# EAGLE board esp32-mqtt-door-opener (EAGLE 9.5.1)
CREVISION: 3.1
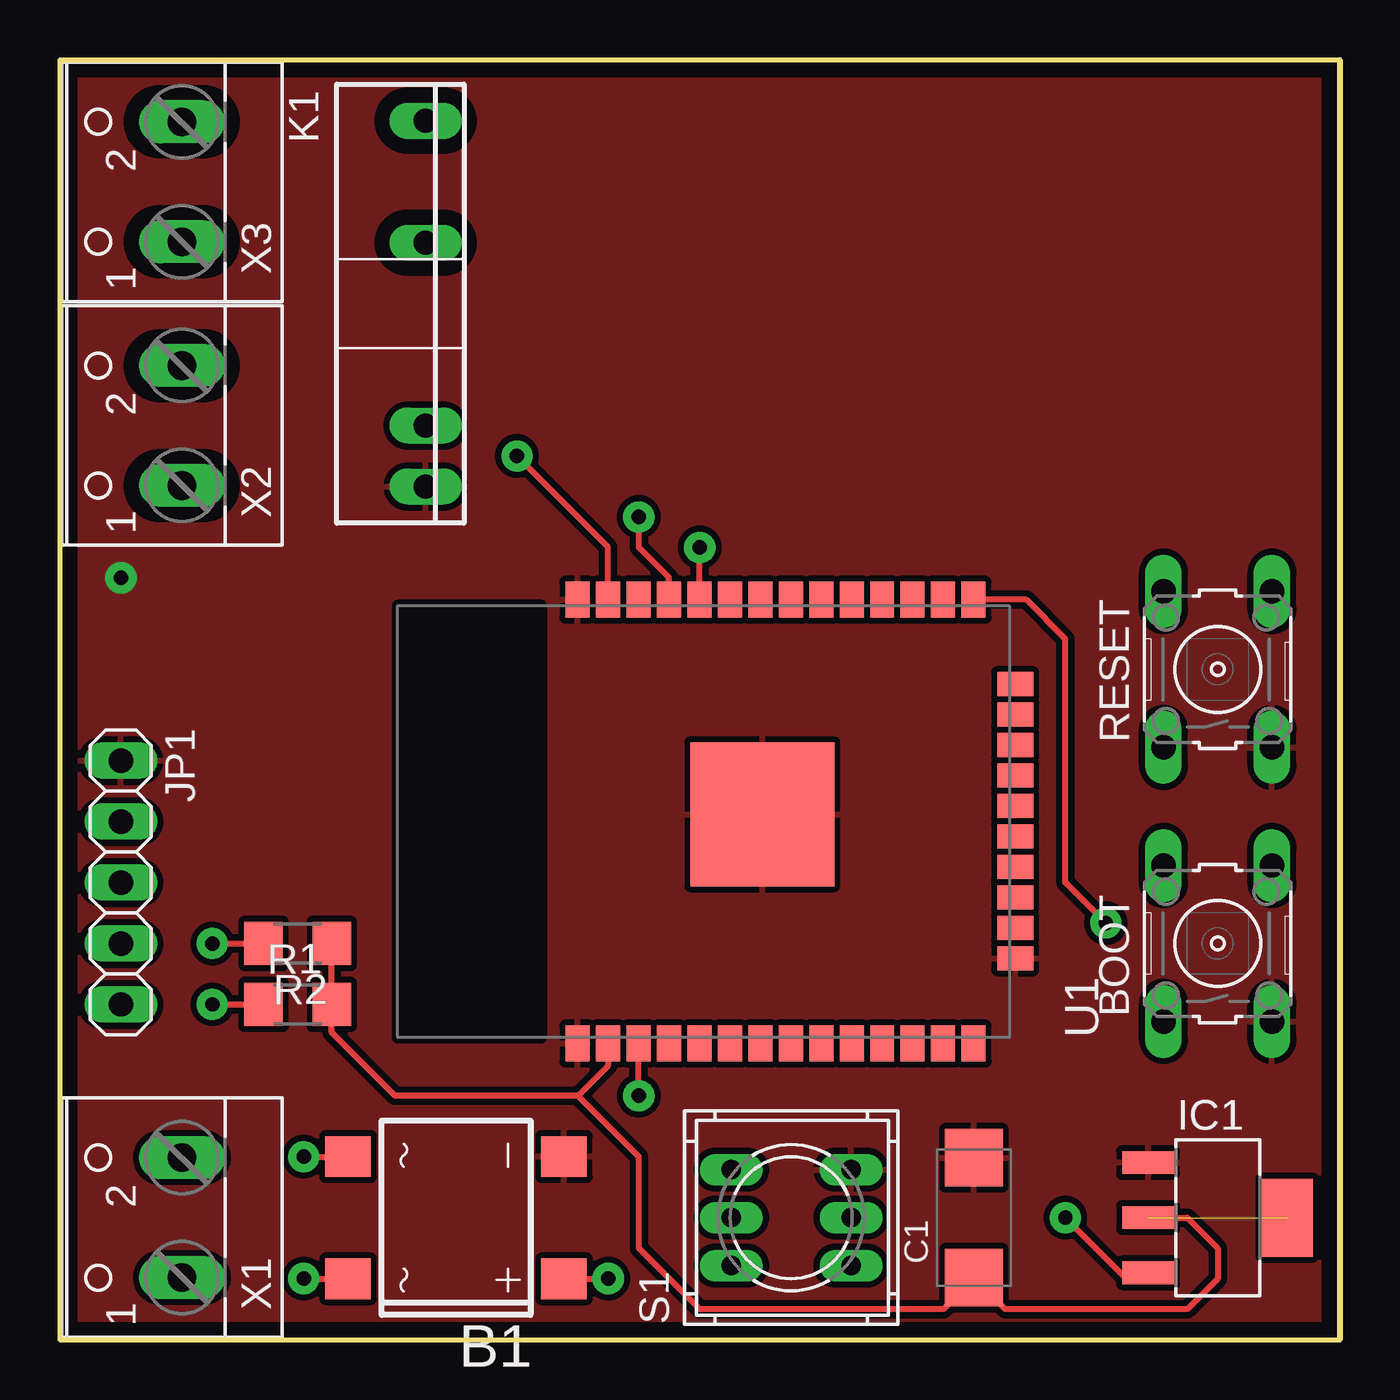
[diagram p0: board, top side]
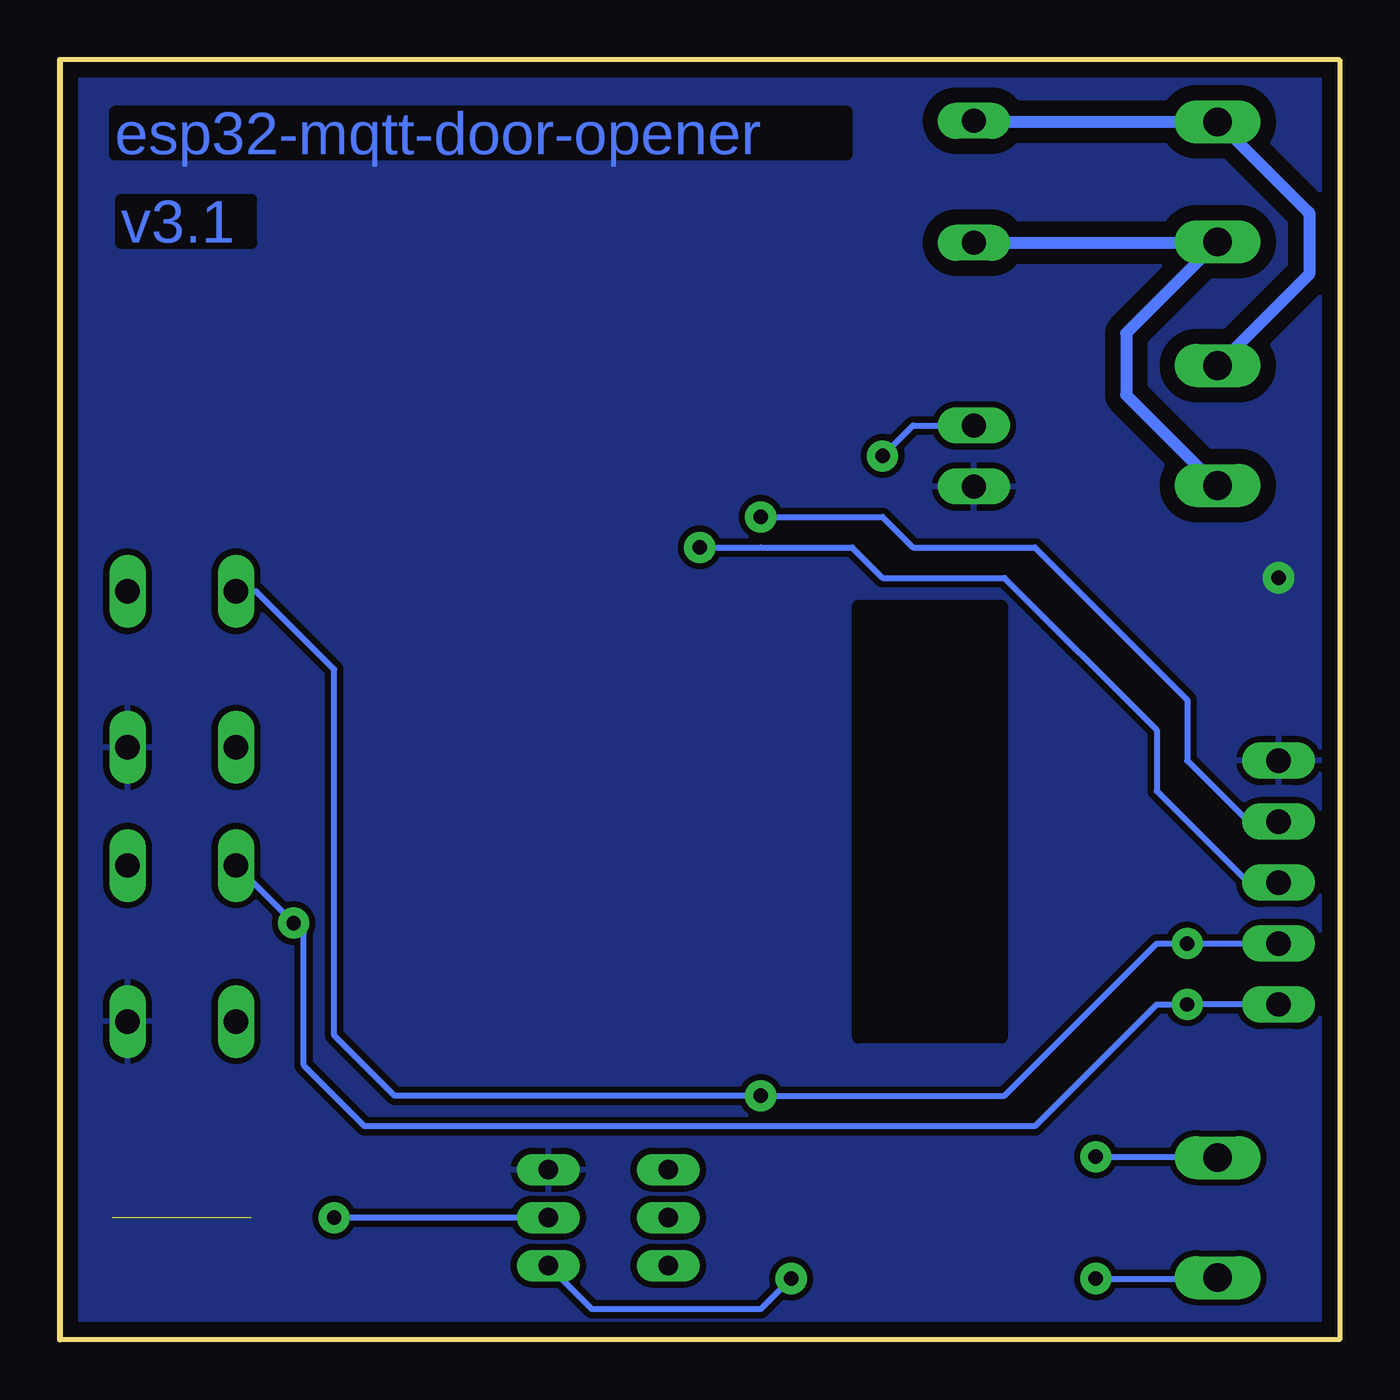
[diagram p1: board, bottom side, seen from below]

Size 53.34 x 53.34 mm. Coordinates in mm from the lower left corner, seen from the top.
Outline: 0,53.34 0,0 53.34,0 53.34,53.34 0,53.34
Copper layers (1*16): Top 0.035mm / dielectric 1.5mm / Bottom 0.035mm
Design rules "default *": minimum track width 6mil, minimum drill 0.35mm, track to track 6mil, track to pad 6mil, pad to pad 6mil, via to via 6mil, smd to smd 6mil, copper to edge 25mil, drill to drill 6mil, minimum pad ring 10mil, minimum via ring 8mil, stop-mask expansion 4mil, vias tented up to drill 0mil, thermal gap 10mil

## Footprints (pad centres in the part's own frame; a part is rotated, then mirrored left to right if it is on the bottom)
DBS = smd 1.7 x 1.9: + -2.55,-4.5; - 2.55,-4.5; AC1 -2.55,4.5; AC2 2.55,4.5
B3F-10XX = drill 1.016 long: 1 -3.251,2.261; 2 3.251,2.261; 3 -3.251,-2.261; 4 3.251,-2.261
SMC_C = smd 2.4 x 2.4: + -2.5,0; - 2.5,0
SOT223 = smd 0.95 x 2.15: 1 -2.3,-2.9; 2 0,-2.9; 3 2.3,-2.9 | smd 3.25 x 2.15: 4 0,2.9
1X05 = drill 1.016 long: 1 -5.08,0; 2 -2.54,0; 3 0,0; 4 2.54,0; 5 5.08,0
S*02S02 = drill 1 long: 1 -7.62,0; 2 -2.54,0; 3 5.08,0; 4 7.62,0
R1206 = smd 1.6 x 1.803: 1 -1.422,0; 2 1.422,0
TL2230 = drill 0.813 long: 1 -2,2.5; 2 0,2.5; 3 2,2.5; 4 -2,-2.5; 5 0,-2.5; 6 2,-2.5
ESP-WROOM-32 = smd 1.5 x 1: 1 -9.25,7; 2 -9.25,5.73; 3 -9.25,4.46; 4 -9.25,3.19; 5 -9.25,1.92; 6 -9.25,0.65; 7 -9.25,-0.62; 8 -9.25,-1.89; 9 -9.25,-3.16; 10 -9.25,-4.43; 11 -9.25,-5.7; 12 -9.25,-6.97; 13 -9.25,-8.24; 14 -9.25,-9.51; 25 9.25,-9.51; 26 9.25,-8.24; 27 9.25,-6.97; 28 9.25,-5.7; 29 9.25,-4.43; 30 9.25,-3.16; 31 9.25,-1.89; 32 9.25,-0.62; 33 9.25,0.65; 34 9.25,1.92; 35 9.25,3.19; 36 9.25,4.46; 37 9.25,5.73; 38 9.25,7 | smd 1 x 1.5: 15 -5.7,-11.25; 16 -4.43,-11.25; 17 -3.16,-11.25; 18 -1.89,-11.25; 19 -0.62,-11.25; 20 0.65,-11.25; 21 1.92,-11.25; 22 3.19,-11.25; 23 4.46,-11.25; 24 5.73,-11.25 | smd 6 x 6: GND 0.3,-0.7
W237-102 = drill 1.194 long: 1 -2.5,-1.27; 2 2.5,-1.27

## Placement (x,y rotation side)
B1  DBS107G  [DBS]  16.51,5.08 90 top
BOOT  [B3F-10XX]  48.26,16.51 90 top
C1  22u  [SMC_C]  38.1,5.08 90 top
IC1  LM1117MP-3.3  [SOT223]  48.26,5.08 270 top
JP1  [1X05]  2.54,19.05 270 top
K1  S202S02  [S*02S02]  15.24,43.18 270 top
R1  10k  [R1206]  9.91,13.97 0 top
R2  10k  [R1206]  9.91,16.51 180 top
RESET  [B3F-10XX]  48.26,27.94 90 top
S1  TL2230  [TL2230]  30.48,5.08 90 top
U1  ESP-WROOM-32  [ESP-WROOM-32]  28.57,21.59 90 top
X1  [W237-102]  3.81,5.08 90 top
X2  [W237-102]  3.81,38.1 90 top
X3  [W237-102]  3.81,48.26 90 top

## Library data of the parts
B1 = rectifier
BOOT RESET = switch-omron; MPN: B3F-1000; OC_FARNELL: 176432; OC_NEWARK: 36M3542
C1 = rcl; SPICEPREFIX: C
IC1 = lm1117_10; MF: Texas Instruments; MPN: LM1117MP-3.3; OC_FARNELL: 9778195; OC_NEWARK: 28X3416
JP1 = pinhead
K1 = S202S02; MPN: S202S02F; OC_FARNELL: 1618475; OC_NEWARK: 14N9588
R1 R2 = rcl; SPICEPREFIX: R
S1 = TL2230
U1 = esp32
X1-X3 = con-wago-500; MPN: 237-102; OC_FARNELL: unknown; OC_NEWARK: 70K9898

## Nets
3V3: C1.+ IC1.2 IC1.4 R1.2 R2.1 U1.2
EN: JP1.4 R2.2 RESET.2 U1.3
GND: B1.- BOOT.3 C1.- IC1.1 JP1.1 K1.4 RESET.3 S1.6 U1.1 U1.15 U1.38 U1.GND
GPIO0: BOOT.2 JP1.5 R1.1 U1.25
GPIO23: K1.3 U1.37
IN: K1.1 X2.2 X3.2
ON/OFF: IC1.3 S1.5
OUT: K1.2 X2.1 X3.1
RX: JP1.3 U1.34
TX: JP1.2 U1.35
VCC: B1.+ S1.4
~1: B1.AC1 X1.1
~2: B1.AC2 X1.2

## Tracks (layer width: path | path; a pad name or v marks a point on that pad's centre or on a via)
3V3  (1 unrouted)
  Top 0.152: 11.18,16.51 11.33,16.36
  Top 0.254: R2.1 11.43,16.61 | 11.33,16.36 R1.2 11.33,12.8 13.97,10.16 21.59,10.16 | U1.2 22.84,11.41 21.59,10.16 | IC1.2 46.99,5.08 48.26,3.81 48.26,2.54 46.99,1.27 39.41,1.27 38.12,2.56 | 38.12,2.56 C1.+ | 38.12,2.56 36.83,1.27 26.67,1.27 24.13,3.81 24.13,7.62 21.59,10.16
  Top 0.508: R2.1 11.18,16.51
EN  (via drill 0.6 pad 1.3)
  Top 0.254: v6.35,16.51 R2.2 | v24.13,10.16 24.11,10.18 U1.3
  Bottom 0.254: JP1.4 v6.35,16.51 7.62,16.51 13.97,10.16 v24.13,10.16 39.4,10.16 41.91,12.67 41.91,27.94 45.16,31.19 RESET.2
GND  (via drill 0.6 pad 1.3)
  other vias: 2.54,31.75
  pour Bottom (isolate 0.254): 0,0 53.34,0 53.34,53.34 19.05,53.34 19.05,43.18 11.43,43.18 11.43,33.02 0,33.02
  pour Bottom (isolate 0.635): 0,53.34 20.32,53.34 20.32,41.91 12.7,41.91 12.7,31.75 0,31.75
  pour Top (isolate 0.635): 0,53.34 20.32,53.34 20.32,41.91 12.7,41.91 12.7,31.75 0,31.75
  pour Top (isolate 0.254): 19.05,53.34 53.34,53.34 53.34,0 0,0 0,33.02 11.43,33.02 11.43,43.18 19.05,43.18
GPIO0  (via drill 0.6 pad 1.3)
  Top 0.254: v6.35,13.97 R1.1 | U1.25 40.28,30.84 41.91,29.21 41.91,20.32 41.91,19.05 v43.6,17.36
  Bottom 0.254: JP1.5 v6.35,13.97 7.62,13.97 12.7,8.89 40.64,8.89 43.18,11.43 43.18,16.94 v43.6,17.36 BOOT.2
GPIO23  (via drill 0.6 pad 1.3)
  Top 0.254: U1.37 22.84,33.03 v19.05,36.83
  Bottom 0.254: v19.05,36.83 17.78,38.1 K1.3
IN
  Bottom 0.508: K1.1 15.2,50.76 X3.2 1.31,46.99 1.27,46.99 1.27,44.41 X2.2
ON/OFF  (via drill 0.6 pad 1.3)
  Top 0.254: v41.91,5.08 44.45,2.54 45.12,2.54 IC1.3
  Bottom 0.254: S1.5 v41.91,5.08
OUT
  Bottom 0.508: X2.1 5.12,35.6 8.89,39.37 8.89,41.95 X3.1 5.12,45.72 K1.2
RX  (via drill 0.6 pad 1.3)
  Top 0.254: U1.34 26.66,33.01 v26.67,33.02
  Bottom 0.254: v26.67,33.02 24.13,33.02 20.32,33.02 19.05,31.75 13.97,31.75 7.62,25.4 7.62,22.86 3.81,19.05 JP1.3
TX  (via drill 0.6 pad 1.3)
  Top 0.254: U1.35 25.39,31.77 24.13,33.02 v24.13,34.29
  Bottom 0.254: v24.13,34.29 19.05,34.29 17.78,33.02 12.7,33.02 6.35,26.67 6.35,24.13 3.81,21.59 JP1.2
VCC  (via drill 0.6 pad 1.3)
  Top 0.254: B1.+ v22.86,2.54
  Bottom 0.254: v22.86,2.54 24.13,1.27 31.17,1.27 S1.4
~1  (via drill 0.6 pad 1.3)
  Top 0.254: v10.16,2.54 B1.AC1
  Bottom 0.254: v10.16,2.54 5.12,2.54 X1.1
~2  (via drill 0.6 pad 1.3)
  Top 0.254: v10.16,7.62 B1.AC2
  Bottom 0.254: v10.16,7.62 5.12,7.62 X1.2

## Text on the board
Bottom: v